# Altium PCB ltk-mw_center_protractor.PcbDoc
Units mil, origin at the board's own origin, x right, y up, seen from the top; angles counter-clockwise.
Board outline 3642.26 x 3642.26 mil, 2 copper layers (Top Layer, Bottom Layer); 1 components, 0 nets, 3 pads, 0 vias.
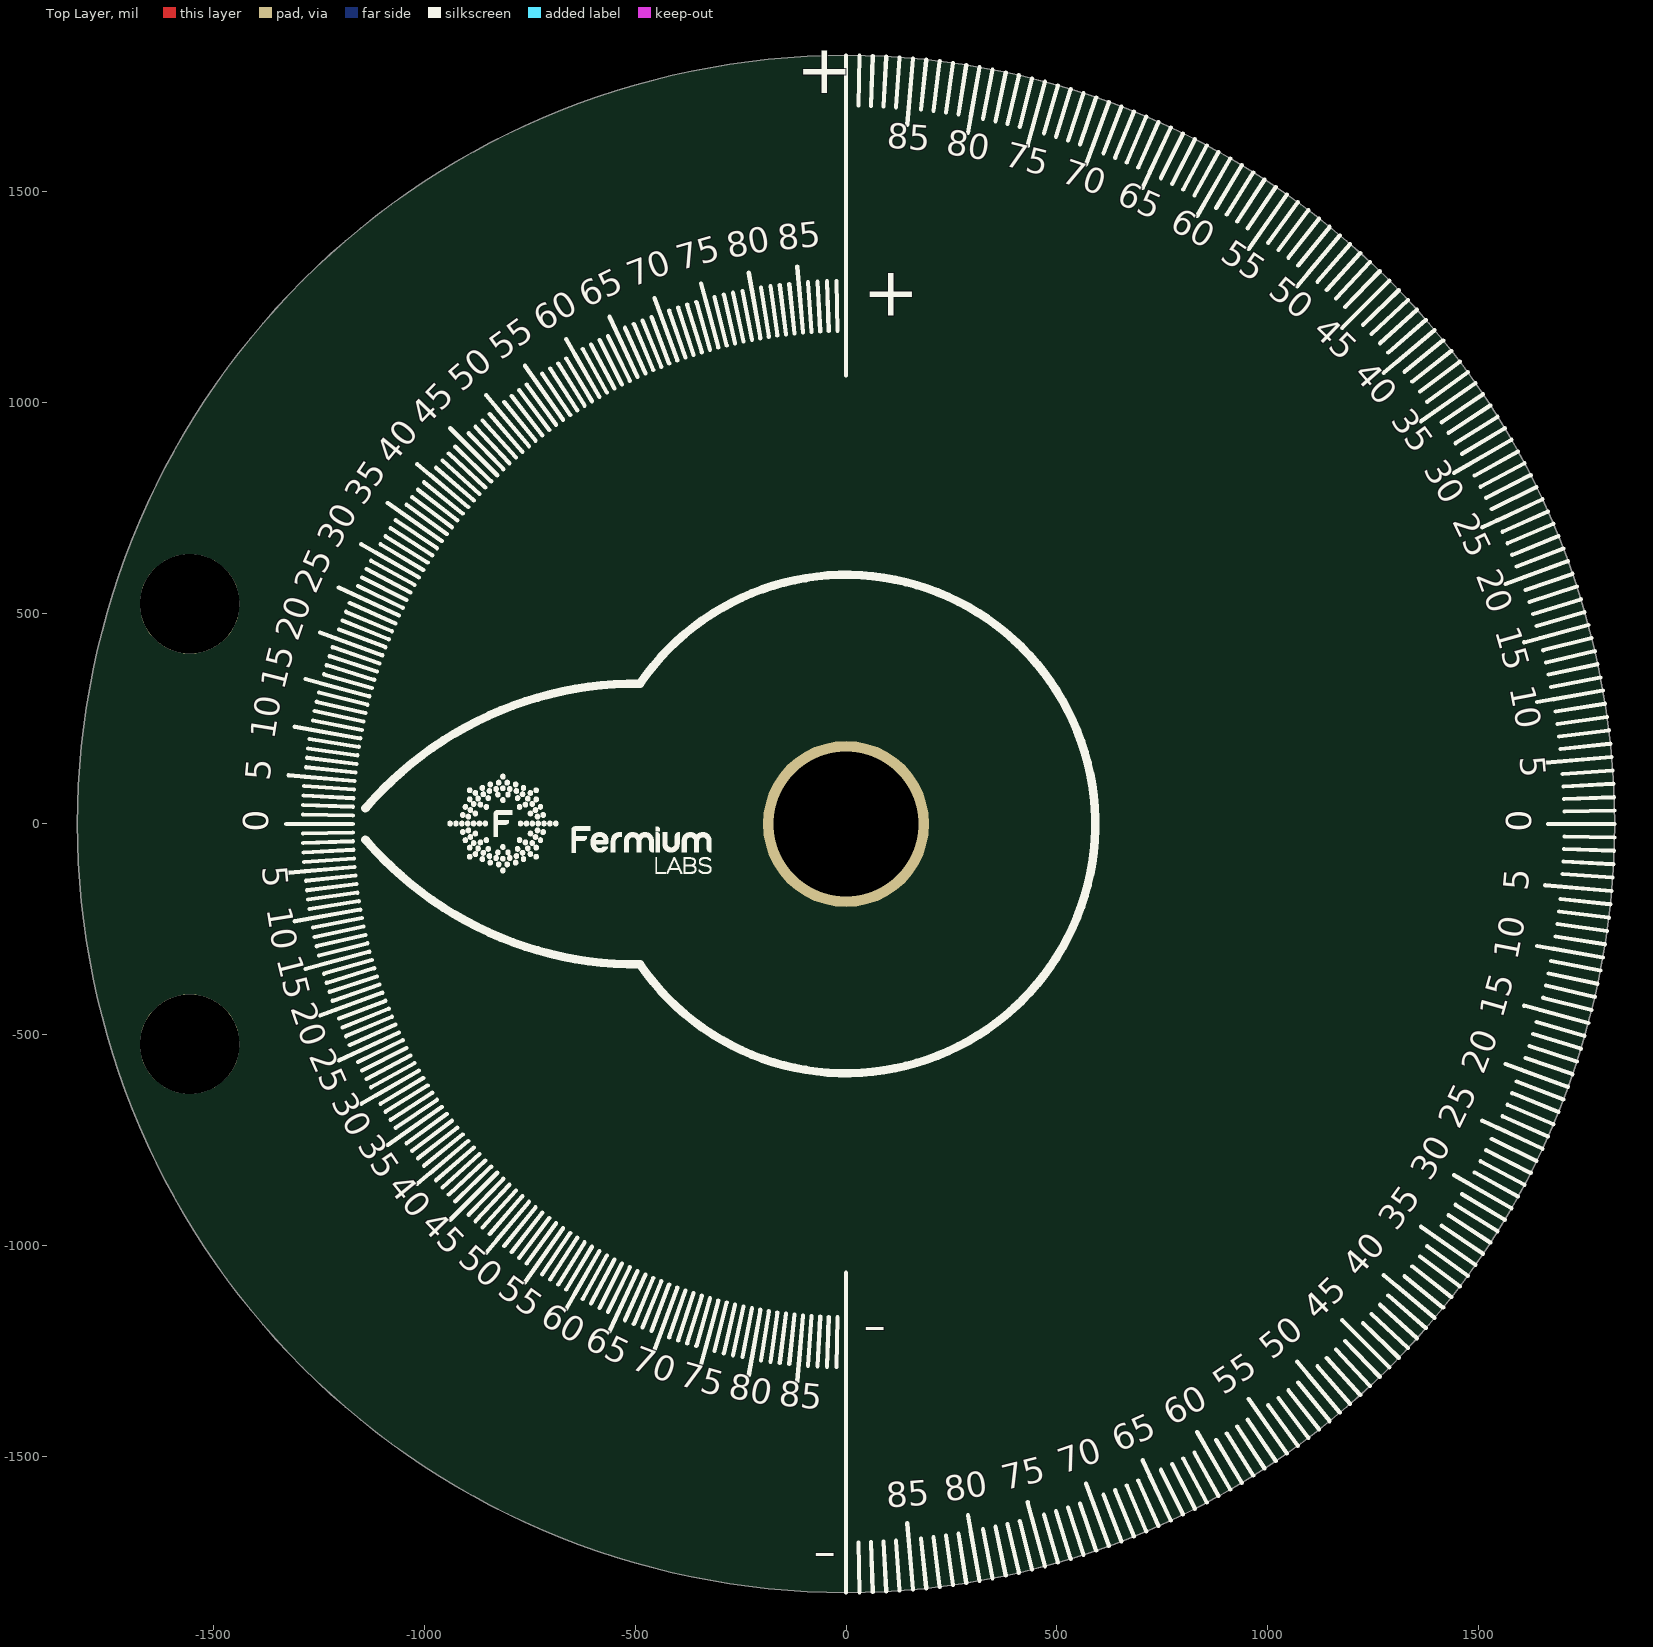
[diagram p0: Top Layer view]
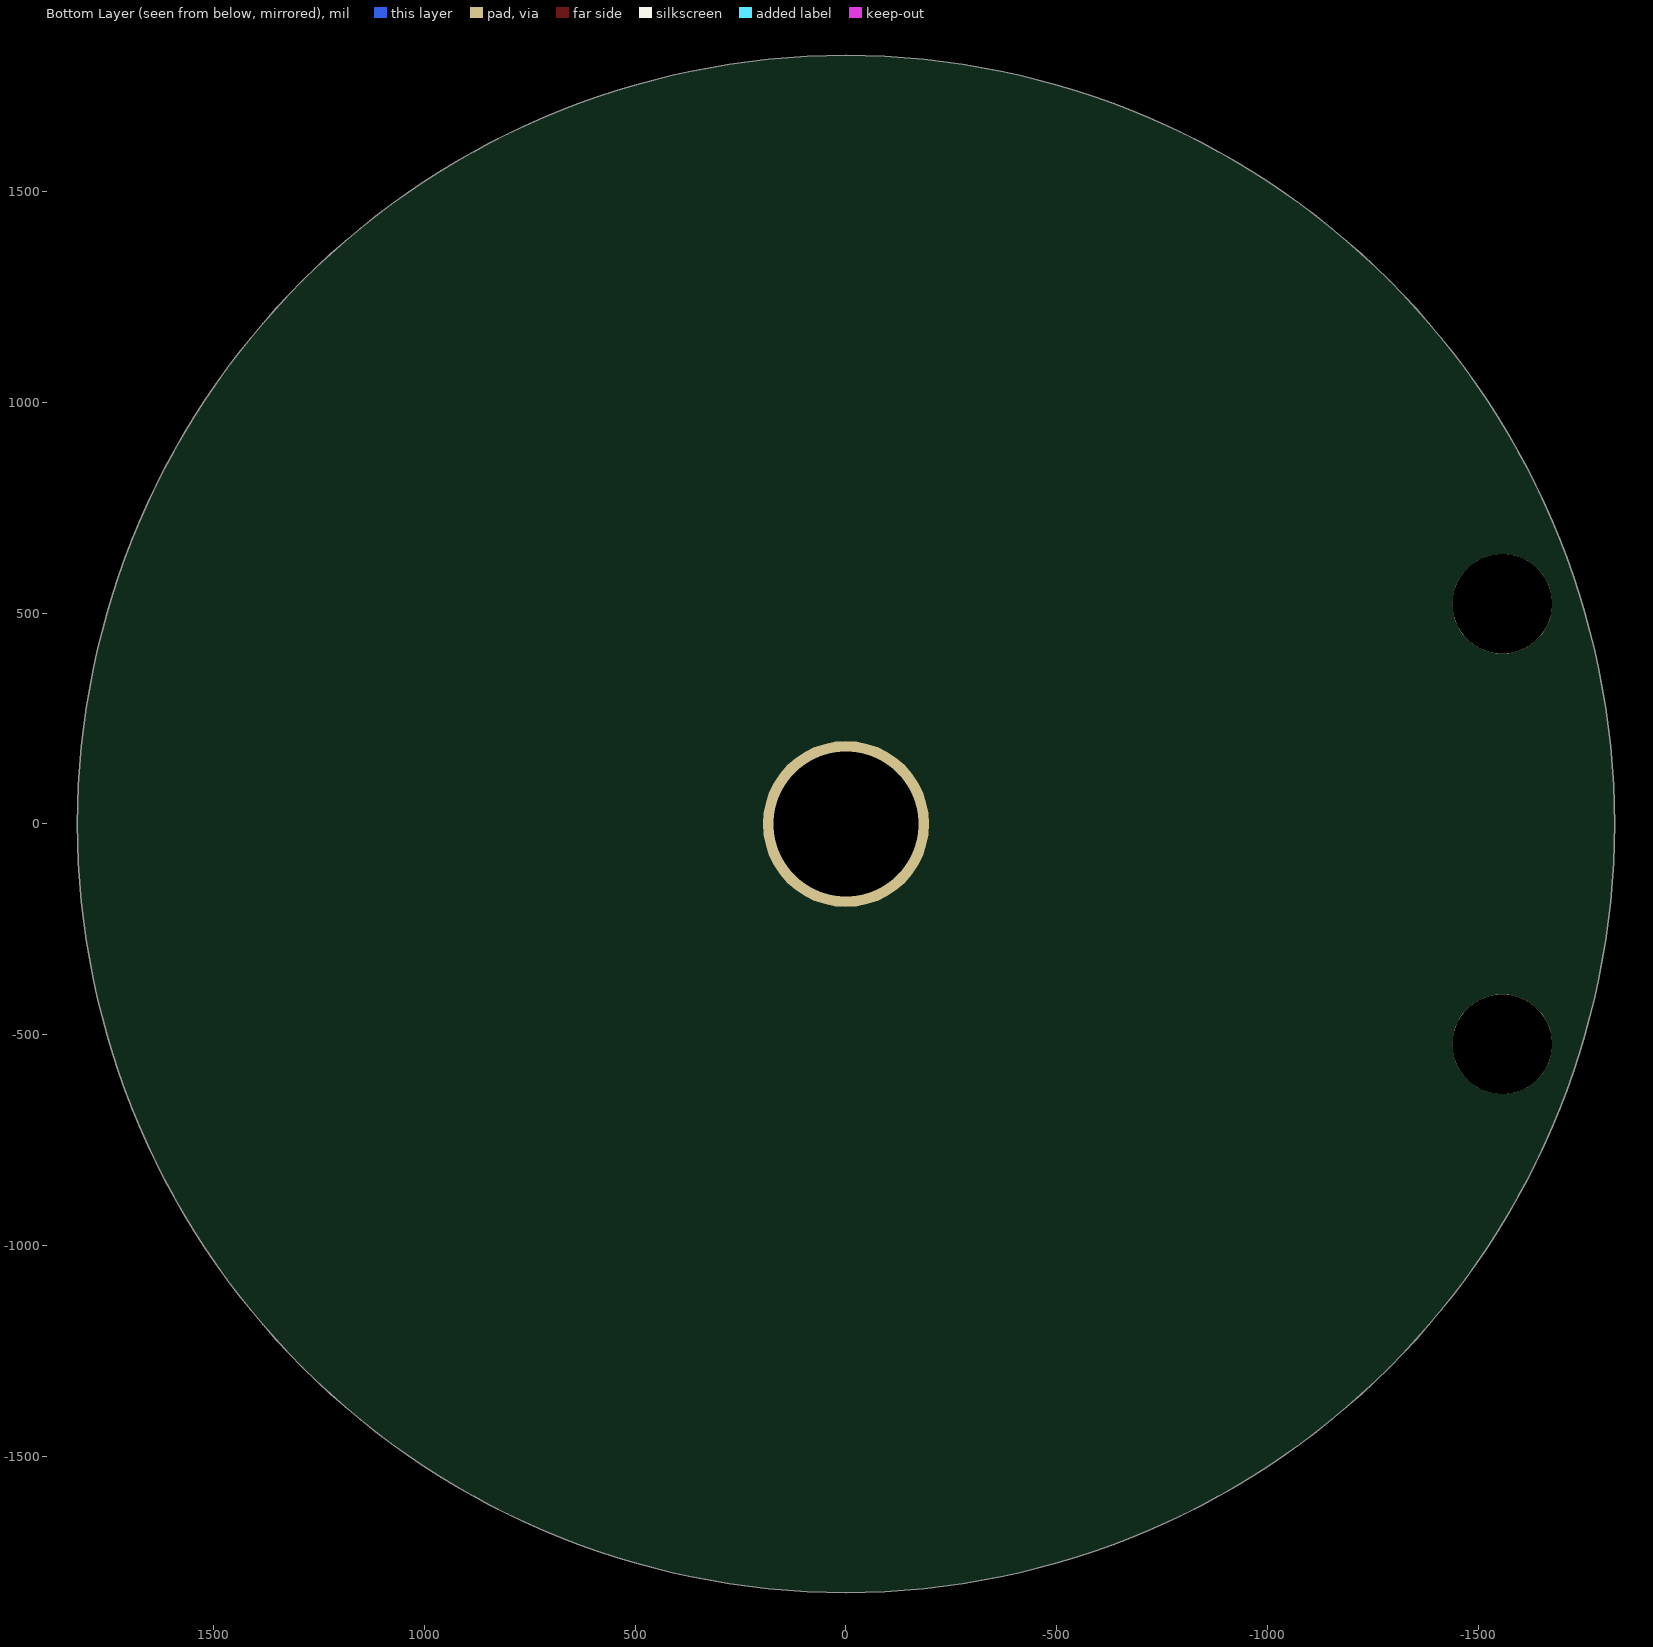
[diagram p1: Bottom Layer view, seen from below]

## Layer stack, top to bottom
Top Solder: solder mask 0.4, Solder Resist, Dk 3.5
Top Layer: signal copper 1.4
Dielectric 1: dielectric 12.6, FR-4, Dk 4.8
Bottom Layer: signal copper 1.4
Bottom Solder: solder mask 0.4, Solder Resist, Dk 3.5

## Board outline
-1821.13,0 ccw(c0,0) 0,-1821.13 ccw(c0,0) 1821.13,0 ccw(c0,0) 0,1821.13 ccw(c0,0)

## Design rules (kind name [scope] priority, off if disabled: settings)
Clearance [All] p1: gap=10 ignorepadtopadclearanceinfootprint=FALSE except(0: Arc-Hole Track-Hole SMDPad-Hole THPad-Hole Via-Hole Fill-Hole Poly-Hole Region-Hole Text-Hole)
PolygonConnect [All] p1: connectstyle=Relief reliefconductorwidth=10 reliefentries=4 polygonreliefangle="90 Angle" airgapwidth=10
RoutingVias [All] p1: holewidth=28 width=50 viastyle="Through Hole" minholewidth=28 minwidth=50 maxholewidth=28 maxwidth=50
SolderMaskExpansion [All] p1: expansion=4
Width [All] p1: maxlimit=10 minlimit=10 preferedwidth=10
30 further rules are at their usual default settings.

## Components (designator, comment, footprint, x,y, rotation, side; value= is the part's Value field where it differs from the comment)
? "Comment" frm-med -944.88,-118.11 r0 top

## Footprints (in the part's own frame and the unit in brackets; to place one, negate y for a bottom-side part, rotate by r counter-clockwise, add the part's x,y. Pads: shape width x height; smd on the part's side, far side on the other; paste and mask are expansions set on the pad)
frm-med [mil]
  silkscreen extent 1,1 626,237

## Free pads (board coordinates)
  round 393.7 hole 344.49: 1(0,0)
  round 236.22 hole 236.22: 2(-1555.12,521.65) 3(-1555.12,-521.65)

## Nets (pads, with @x,y where several pads share a name; then routed paths per layer and width w, separated by ;. In a path a pad name is that pad's centre, name@x,y a point inside that pad or via, vN(x,y) a via of type N, cw(c..) or ccw(c..) an arc to the next point about the centre after c; other vN are vias at no path point)

## Silkscreen, mask and mechanical layers (free items; w line width, h text height)
Top Overlay:
  drawing of 437 lines, arcs and shapes, not listed
  text "+" at -118.11,1692.91 h200
  text "85" at 94.64,1581.93 h100 r355.9
  text "80" at 232.16,1567.66 h100 r350.9
  text "75" at 367.91,1541.46 h100 r345.9
  text "70" at 500.85,1503.53 h100 r340.9
  text "65" at 629.99,1454.15 h100 r335.9
  text "60" at 754.33,1393.71 h100 r330.9
  text "85" at -157.21,1339.36 h100 r5.9
  text "55" at 872.93,1322.67 h100 r325.9
  text "80" at -273.34,1320.56 h100 r10.9
  text "75" at -387.4,1291.71 h100 r15.9
  text "70" at -498.5,1253.03 h100 r20.9
  text "50" at 984.88,1241.55 h100 r320.9
  text "65" at -605.82,1204.82 h100 r25.9
  text "+" at 39.37,1165.35 h200
  text "45" at 1089.35,1150.99 h100 r315.9
  text "60" at -708.52,1147.43 h100 r30.9
  text "55" at -805.83,1081.32 h100 r35.9
  text "40" at 1185.52,1051.67 h100 r310.9
  text "50" at -897,1006.97 h100 r40.9
  text "35" at 1272.66,944.34 h100 r305.9
  text "45" at -981.35,924.96 h100 r45.9
  text "40" at -1058.23,835.91 h100 r50.9
  text "30" at 1350.12,829.83 h100 r300.9
  text "35" at -1127.06,740.49 h100 r55.9
  text "25" at 1417.31,709 h100 r295.9
  text "30" at -1187.31,639.45 h100 r60.9
  text "20" at 1473.71,582.77 h100 r290.9
  text "25" at -1238.52,533.53 h100 r65.9
  text "15" at 1518.9,452.11 h100 r285.9
  text "20" at -1280.31,423.56 h100 r70.9
  text "10" at 1552.52,318.01 h100 r280.9
  text "15" at -1312.36,310.36 h100 r75.9
  text "10" at -1334.41,194.8 h100 r80.9
  text "5" at 1576.99,156.74 h100 r275
  text "5" at -1344.92,98.89 h100 r85
  text "0" at -1348.43,-18.7 h100 r90
  text "0" at -1348.43,-18.7 h100 r90
  text "0" at 1643.7,-18.7 h100 r90
  text "0" at 1643.7,-18.7 h100 r90
  text "5" at -1403.75,-104.04 h100 r275
  text "5" at 1635.82,-161.89 h100 r85
  text "10" at -1392.72,-204.14 h100 r279.1
  text "15" at -1369.63,-324.75 h100 r284.1
  text "10" at 1610.51,-329.18 h100 r79.1
  text "20" at -1336.12,-442.88 h100 r289.1
  text "15" at 1575.69,-468.29 h100 r74.1
  text "25" at -1292.43,-557.65 h100 r294.1
  text "20" at 1528.88,-603.84 h100 r69.1
  text "30" at -1238.91,-668.17 h100 r299.1
  text "25" at 1470.44,-734.79 h100 r64.1
  text "35" at -1175.96,-773.6 h100 r304.1
  text "30" at 1400.8,-860.15 h100 r59.1
  text "40" at -1104.06,-873.15 h100 r309.1
  text "45" at -1023.76,-966.05 h100 r314.1
  text "35" at 1320.5,-978.97 h100 r54.1
  text "50" at -935.67,-1051.6 h100 r319.1
  text "40" at 1230.15,-1090.33 h100 r49.1
  text "55" at -840.46,-1129.15 h100 r324.1
  text "45" at 1130.44,-1193.4 h100 r44.1
  text "60" at -738.85,-1198.11 h100 r329.1
  text "65" at -631.61,-1257.94 h100 r334.1
  text "-" at 39.37,-1275.59 h200
  text "50" at 1022.13,-1287.38 h100 r39.1
  text "70" at -519.57,-1308.2 h100 r339.1
  text "75" at -403.58,-1348.51 h100 r344.1
  text "55" at 906.04,-1371.57 h100 r34.1
  text "80" at -284.51,-1378.55 h100 r349.1
  text "85" at -163.28,-1398.1 h100 r354.1
  text "60" at 783.05,-1445.31 h100 r29.1
  text "65" at 654.1,-1508.06 h100 r24.1
  text "70" at 520.18,-1559.33 h100 r19.1
  text "75" at 382.29,-1598.73 h100 r14.1
  text "80" at 241.5,-1625.97 h100 r9.1
  text "85" at 98.87,-1640.83 h100 r4.1
  text "-" at -78.74,-1811.02 h200
Mechanical 1:
  the board outline again, w10
Mechanical 2:
  circle w0.5: c-1555.12,521.65 r98.43
  circle w0.5: c-1555.12,-521.65 r98.43
  circle w0.5: c0,0 r177.17
  circle w0.5: c0,0 r177.17
  circle w0.5: c0,0 r177.17
  circle w0.5: c0,0 r1168.86
  circle w0.5: c0,0 r1402.19
  lines w0.5: -487.96,-332.63 ccw(c0,0) -487.96,332.63